# EAGLE board quad_probability_gate (EAGLE 8.0.0)
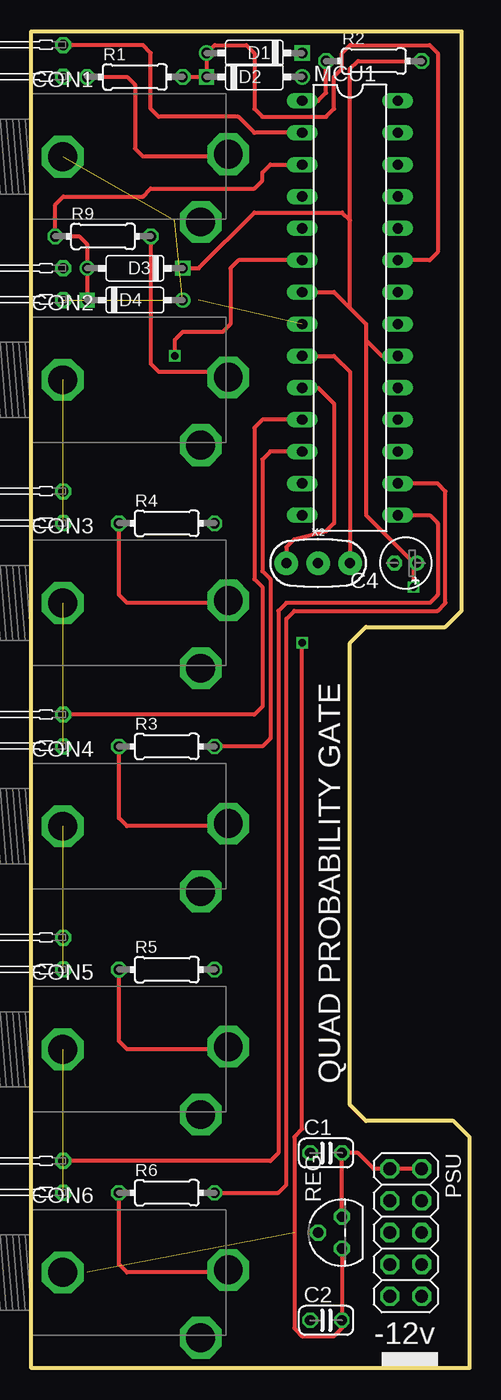
[diagram p0: board, top side]
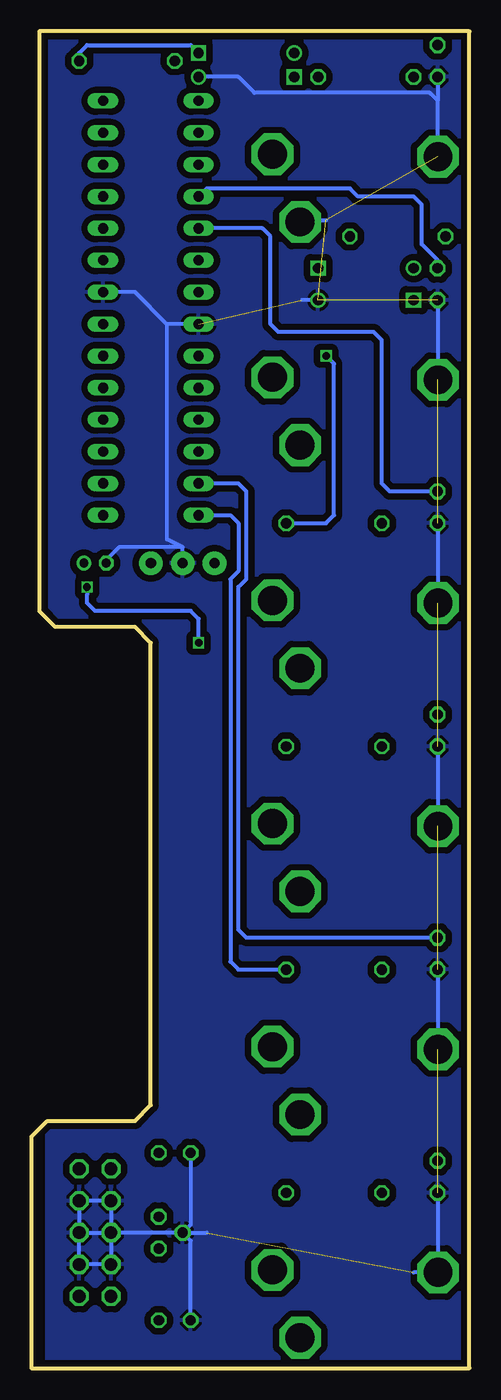
[diagram p1: board, bottom side, seen from below]

Size 34.92 x 106.5 mm. Coordinates in mm from the lower left corner, seen from the top.
Outline: 0,0 0,106.5 34.29,106.5 34.29,60.33 33.02,59.05 26.67,59.05 25.4,57.78 25.4,20.95 26.67,19.68 33.66,19.68 34.92,18.41 34.92,0 0,0
Copper layers (1*16): Top 0.035559375mm / dielectric 1.6mm / Bottom 0.035559375mm
Design rules "oshpark-2layer": minimum track width 6mil, minimum drill 10mil, track to track 6mil, track to pad 6mil, pad to pad 6mil, via to via 6mil, smd to smd 6mil, copper to edge 15mil, drill to drill 6mil, minimum pad ring 5mil, minimum via ring 5mil, stop-mask expansion 2.5mil, vias tented up to drill 0mil, thermal gap 10mil

## Footprints (pad centres in the part's own frame; a part is rotated, then mirrored left to right if it is on the bottom)
C025-024X044 = drill 0.813 octagon: 1 -1.27,0; 2 1.27,0
E1,8-4 = drill 0.711 pad 1.168: + -0.889,0 | drill 0.711 pad 1.168 octagon: - 0.889,0
PJ302M = drill 2.3 pad 3.3 octagon: GND 2.5,0; SW 13.5,-5.2; TIP 15.7,0.2
DO35-7 = drill 0.813: A 3.81,0 | drill 0.813 square: C -3.81,0
LED3MM_H7,5MM = drill 0.813 pad 1.27 octagon: A 0,-1.27; K 0,1.27
DIL28-3 = drill 0.813 long: 1 -16.51,-3.81; 2 -13.97,-3.81; 3 -11.43,-3.81; 4 -8.89,-3.81; 5 -6.35,-3.81; 6 -3.81,-3.81; 7 -1.27,-3.81; 8 1.27,-3.81; 9 3.81,-3.81; 10 6.35,-3.81; 11 8.89,-3.81; 12 11.43,-3.81; 13 13.97,-3.81; 14 16.51,-3.81; 15 16.51,3.81; 16 13.97,3.81; 17 11.43,3.81; 18 8.89,3.81; 19 6.35,3.81; 20 3.81,3.81; 21 1.27,3.81; 22 -1.27,3.81; 23 -3.81,3.81; 24 -6.35,3.81; 25 -8.89,3.81; 26 -11.43,3.81; 27 -13.97,3.81; 28 -16.51,3.81
2X05 = drill 1.016 octagon: 1 -5.08,-1.27; 2 -5.08,1.27; 3 -2.54,-1.27; 4 -2.54,1.27; 5 0,-1.27; 6 0,1.27; 7 2.54,-1.27; 8 2.54,1.27; 9 5.08,-1.27; 10 5.08,1.27
0204/7 = drill 0.813 octagon: 1 -3.81,0; 2 3.81,0
TO92 = drill 0.813 pad 1.27 octagon: 1 -1.27,0; 2 0,1.905; 3 1.27,0
RESONATOR-PTH-7.6X3.8 = drill 0.8 pad 1.88: 1 -2.54,0; 2 0,0; 3 2.54,0

## Placement (x,y rotation side)
C1  [C025-024X044]  23.5,17.14 0 top
C2  [C025-024X044]  23.5,3.81 0 top
C4  [E1,8-4]  29.84,64.14 180 top
CON1  [PJ302M]  0,96.52 0 top
CON2  [PJ302M]  0,78.74 0 top
CON3  [PJ302M]  0,60.96 0 top
CON4  [PJ302M]  0,43.18 0 top
CON5  [PJ302M]  0,25.4 0 top
CON6  [PJ302M]  0,7.62 0 top
D1  [DO35-7]  17.78,104.78 180 top
D2  [DO35-7]  17.78,102.87 0 top
D3  [DO35-7]  8.26,87.63 180 top
D4  [DO35-7]  8.26,85.09 0 top
LED1  [LED3MM_H7,5MM]  2.54,104.14 0 top
LED2  [LED3MM_H7,5MM]  2.54,86.36 0 top
LED3  [LED3MM_H7,5MM]  2.54,68.58 0 top
LED4  [LED3MM_H7,5MM]  2.54,50.8 0 top
LED5  [LED3MM_H7,5MM]  2.54,33.02 0 top
LED6  [LED3MM_H7,5MM]  2.54,15.24 0 top
MCU1  [DIL28-3]  25.4,84.45 270 top
PSU  [2X05]  29.84,10.79 270 top
R1  [0204/7]  8.26,102.87 0 top
R2  [0204/7]  27.3,104.14 0 top
R3  [0204/7]  10.79,49.53 0 top
R4  [0204/7]  10.79,67.31 0 top
R5  [0204/7]  10.79,31.75 0 top
R6  [0204/7]  10.79,13.97 0 top
R9  [0204/7]  5.71,90.17 0 top
REG  [TO92]  24.77,10.79 90 top
X2  [RESONATOR-PTH-7.6X3.8]  22.86,64.14 0 top

## Library data of the parts
C1 C2 C4 R1-R6 R9 = rcl
CON1-CON6 = pj302m
D1-D4 = MusicThingModular
LED1-LED6 = led
MCU1 = ic-package
PSU = pinhead
REG = national-semiconductor
X2 = SparkFun-Clocks

## Nets
G: C2.1 D4.A LED1.A LED2.A LED3.A LED4.A LED5.A LED6.A MCU1.8 MCU1.22 PSU.3 PSU.4 PSU.5 PSU.6 PSU.7 PSU.8 REG.2 X2.2
S$2: LED1.K MCU1.2
S$3: MCU1.10 X2.1
S$4: R9.2
S$5: MCU1.9
S$6: D4.C MCU1.3 R9.1
S$7: MCU1.1 R2.1
S$8: C1.2 PSU.2 REG.3
S$10: R1.1
S$11: D1.A D2.C MCU1.23 R1.2
S$14: LED2.K MCU1.4
S$15: LED3.K MCU1.5
S$17: R4.1
S$18: R6.1
S$19: MCU1.6 R4.2
S$24: R3.1
S$25: R5.1
S$26: LED4.K MCU1.11
S$27: MCU1.12 R3.2
S$28: LED5.K MCU1.13
S$29: MCU1.14 R5.2
S$30: LED6.K MCU1.15
S$31: MCU1.16 R6.2
VCC: C2.2 D1.C D3.C MCU1.7 MCU1.20 R2.2 REG.1

## Tracks (layer width: path | path; a pad name or v marks a point on that pad's centre or on a via)
G  (9 unrouted)
  Bottom 0.305: MCU1.8 24.13,83.19 | 24.13,83.19 26.67,85.72 MCU1.22 | 24.13,83.19 24.13,66.04 22.86,65.41 | X2.2 22.86,65.41 | 22.86,65.41 27.94,65.41 29.21,64.14 | 22.23,17.14 22.23,11.43 REG.2 | C2.1 22.23,10.16 REG.2 | PSU.6 PSU.4 PSU.3 PSU.5 | PSU.6 PSU.5 | PSU.5 PSU.7 PSU.8 PSU.6 | REG.2 PSU.5 | REG.2 20.95,10.79 | LED6.A 2.54,7.62 4.45,7.62 | LED5.A 2.54,25.4 | LED4.A 2.54,43.18 | LED3.A 2.54,60.96 | LED2.A 2.54,78.74 | 2.54,96.52 2.54,100.97 | 2.54,100.97 3.17,101.6 17.14,101.6 18.41,102.87 21.59,102.87 | LED1.A 2.54,100.97 | 13.97,91.44 11.43,91.44 | D4.A 13.34,85.09
  pour Bottom (isolate 0.508): 33.66,0 33.66,106.68 0,106.68 0,0
S$2
  Top 0.305: MCU1.2 17.78,98.42 16.51,99.69 10.16,99.69 9.53,100.33 9.53,104.78 8.89,105.41 LED1.K
S$3
  Top 0.305: X2.1 20.32,65.41 20.95,66.04 23.5,66.67 24.13,67.31 24.13,76.83 22.86,78.11 MCU1.10
S$4
  Top 0.305: R9.2 9.53,80.01 10.16,79.38 15.24,79.38
S$5
  Top 0.305: MCU1.9 24.13,80.64 25.4,79.38 25.4,64.14
S$6
  Top 0.305: MCU1.3 19.05,95.89 18.41,95.25 18.41,94.61 17.78,93.98 9.53,93.98 8.89,93.34 2.54,93.34 1.91,92.71 R9.1 3.81,90.17 4.45,89.53 D4.C
S$7
  Top 0.305: MCU1.1 22.86,100.97 23.5,101.6 R2.1
S$8
  Top 0.305: PSU.2 27.3,15.88 26.04,17.14 C1.2 REG.3
S$10
  Top 0.305: R1.1 7.62,102.87 8.26,102.23 8.26,97.16 8.89,96.52 15.88,96.52
S$11
  Top 0.305: MCU1.23 31.75,88.27 32.38,88.9 32.38,104.78 31.75,105.41 25.4,105.41 24.77,104.78 24.77,103.5 24.13,102.87 24.13,100.33 23.5,99.69 18.41,99.69 17.78,100.33 17.78,104.78 17.14,105.41 14.61,105.41 D1.A D2.C R1.2
S$14
  Bottom 0.305: LED2.K 2.54,88.27 3.81,89.53 3.81,92.71 4.45,93.34 8.89,93.34 9.53,93.98 20.95,93.98 MCU1.4
S$15
  Bottom 0.305: LED3.K 6.35,69.85 6.99,70.48 6.99,81.92 7.62,82.55 15.24,82.55 15.88,83.19 15.88,90.17 16.51,90.81 MCU1.5
S$17
  Top 0.305: 15.88,60.96 7.62,60.96 6.99,61.59 R4.1
S$18
  Top 0.305: 15.88,7.62 7.62,7.62 6.99,8.26 R6.1
S$19  (via drill 0.6)
  Top 0.305: MCU1.6 16.51,88.27 15.88,87.63 15.88,83.19 15.24,82.55 12.06,82.55 11.43,81.92 v11.43,80.64
  Bottom 0.305: R4.2 11.43,67.31 10.79,67.94 10.79,80.01 v11.43,80.64
S$24
  Top 0.305: 15.88,43.18 7.62,43.18 6.99,43.81 R3.1
S$25
  Top 0.305: 15.88,25.4 7.62,25.4 6.99,26.04 R5.1
S$26
  Top 0.305: MCU1.11 18.41,75.56 17.78,74.93 17.78,62.87 18.41,62.23 18.41,52.7 17.78,52.07 LED4.K
S$27
  Top 0.305: MCU1.12 19.05,73.03 18.41,72.39 18.41,63.5 19.05,62.87 19.05,50.16 18.41,49.53 R3.2
S$28
  Bottom 0.305: LED5.K 17.78,34.29 18.41,34.92 18.41,62.23 17.78,62.87 17.78,69.85 18.41,70.48 MCU1.13
S$29
  Bottom 0.305: MCU1.14 19.05,67.94 18.41,67.31 18.41,63.5 19.05,62.87 19.05,32.38 18.41,31.75 R5.2
S$30
  Top 0.305: MCU1.15 31.75,67.94 32.38,67.31 32.38,61.59 31.75,60.96 20.32,60.96 19.68,60.33 19.68,17.14 19.05,16.51 LED6.K
S$31
  Top 0.305: R6.2 19.68,13.97 20.32,14.61 20.32,59.69 20.95,60.33 32.38,60.33 33.02,60.96 33.02,69.85 32.38,70.48 MCU1.16
VCC  (via drill 0.6)
  Top 0.305: D3.C 13.34,87.63 17.78,92.08 24.77,92.08 25.4,91.44 | MCU1.7 24.13,85.72 25.4,84.45 | 25.4,84.45 26.67,83.19 26.67,81.92 | MCU1.20 27.94,80.64 26.67,81.92 | 26.67,81.92 26.67,67.94 30.48,64.14 v30.48,62.23 | 25.4,84.45 25.4,91.44 | 25.4,91.44 25.4,103.5 26.04,104.14 R2.2 | REG.1 C2.2 24.77,3.17 24.13,2.54 21.59,2.54 20.95,3.17 20.95,18.41 21.59,19.05 v21.59,57.78
  Bottom 0.305: R2.2 31.11,104.78 30.48,105.41 22.23,105.41 D1.C | v21.59,57.78 21.59,59.69 22.23,60.33 29.84,60.33 30.48,60.96 30.48,61.59 v30.48,62.23

## Text on the board
tNames: QUAD PROBABILITY GATE | -12v